# EAGLE board 副机 插座 v0.2 (EAGLE 6.3)
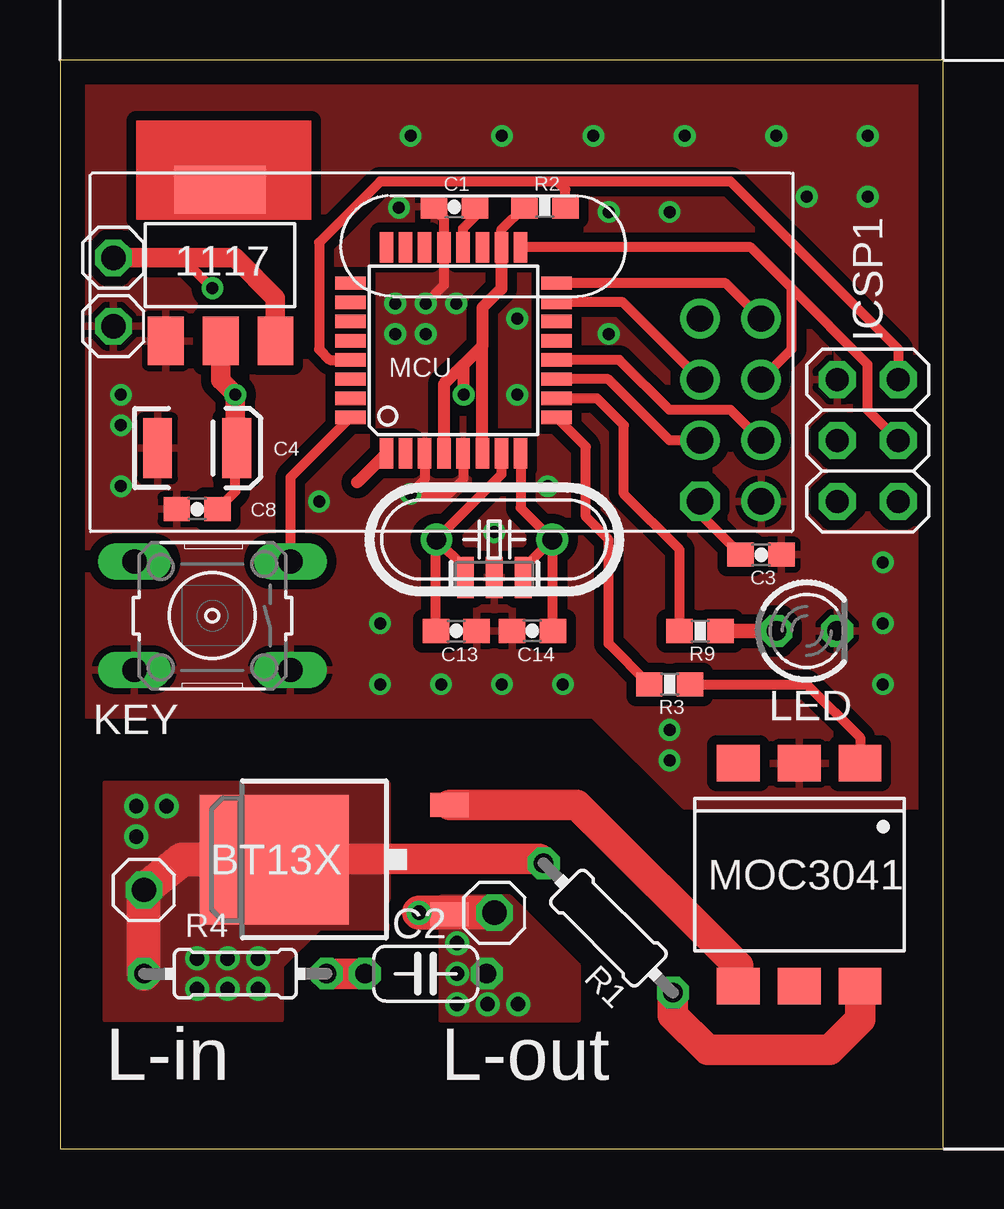
[diagram p0: board, top side]
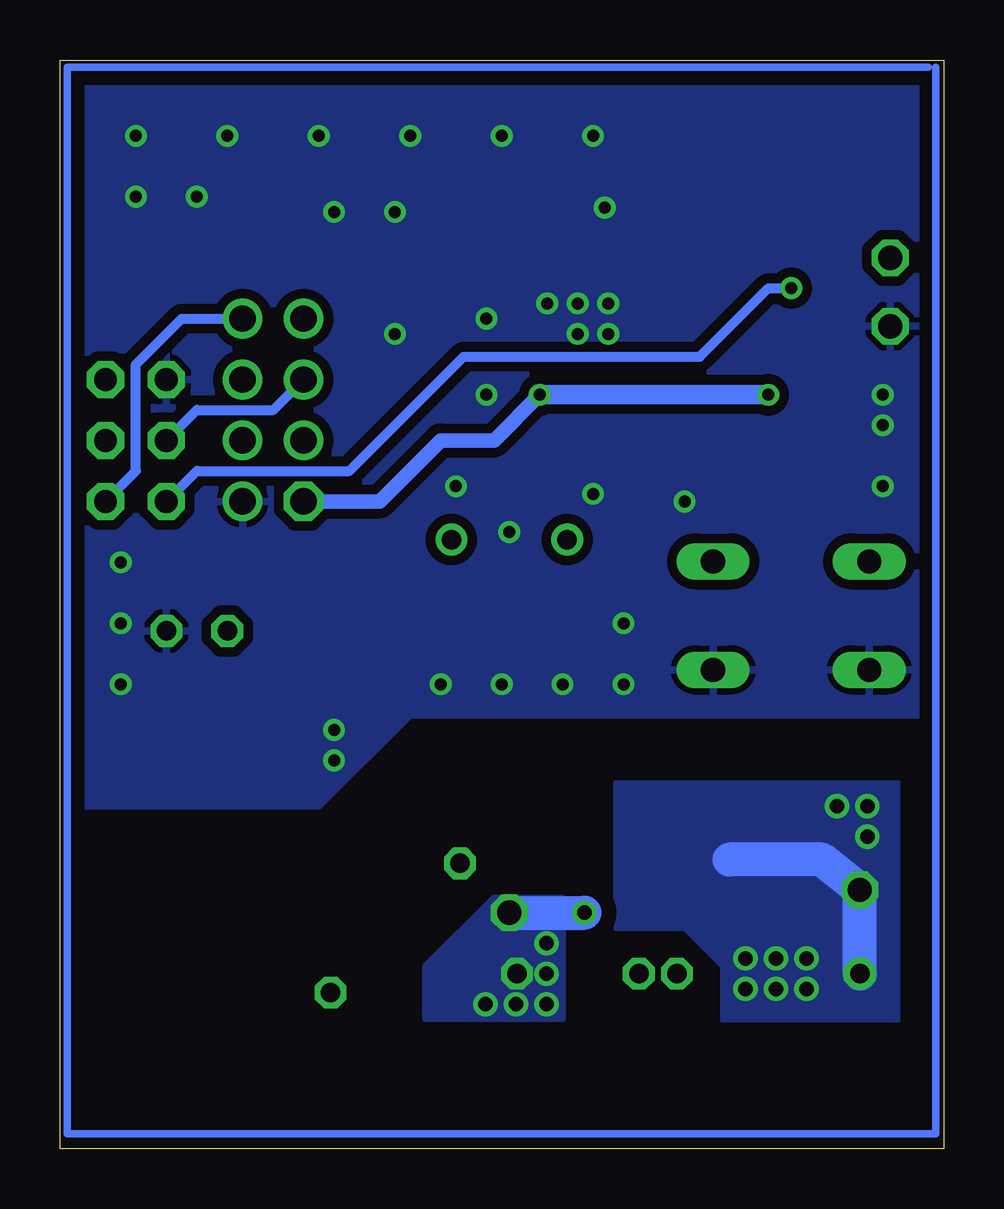
[diagram p1: board, bottom side, seen from below]

Size 36.81 x 45.39 mm. Coordinates in mm from the lower left corner, seen from the top.
Outline: 0,0 36.81,0 36.81,45.39 0,45.39 0,0
Copper layers (1*16): Top 0.035mm / dielectric 1.5mm / Bottom 0.035mm
Design rules "default": minimum track width 10mil, minimum drill 24mil, track to track 8mil, track to pad 8mil, pad to pad 8mil, via to via 8mil, smd to smd 8mil, copper to edge 40mil, drill to drill 8mil, minimum pad ring 10mil, minimum via ring 8mil, stop-mask expansion 4mil, vias tented up to drill 0mil, thermal gap 10mil
Net classes: 0 default: width 0.254 mm, clearance 0.254 mm; 1 power: width 0.381 mm; 2 gnd: width 0.305 mm, drill 0.559 mm, clearance 0.254 mm; 3 usbvcc: width 0.508 mm, drill 0.61 mm, clearance 0.254 mm

## Footprints (pad centres in the part's own frame; a part is rotated, then mirrored left to right if it is on the bottom)
SOT223 = smd 1.499 x 2.007: 1 -2.261,-3.15; 2 0.025,-3.15; 3 2.311,-3.15 | smd 3.81 x 2.007: 4 0,3.15
TO252 = smd 1 x 1.6: 1 -2.28,-4.8; 2 2.28,-4.8 | smd 5.4 x 6.2: 3 0,2.5
0603-CAP = smd 1.1 x 1: 1 -0.85,0; 2 0.85,0
C050-024X044 = drill 0.813 octagon: 1 -2.54,0; 2 2.54,0
EIA3528 = smd 1.2 x 2.5: A 1.65,0; C -1.65,0
2X03 = drill 0.95 pad 1.55 octagon: 1 -2.54,-1.27; 2 -2.54,1.27; 3 0,-1.27; 4 0,1.27; 5 2.54,-1.27; 6 2.54,1.27
B3F-10XX = drill 1.016 long: 1 -3.251,2.261; 2 3.251,2.261; 3 -3.251,-2.261; 4 3.251,-2.261
LED3MM = drill 0.813 octagon: A -1.27,0; K 1.27,0
TQFP32-08 = smd 1.27 x 0.559: 1 -4.293,2.8; 2 -4.293,2; 3 -4.293,1.2; 4 -4.293,0.4; 5 -4.293,-0.4; 6 -4.293,-1.2; 7 -4.293,-2; 8 -4.293,-2.8; 17 4.293,-2.8; 18 4.293,-2; 19 4.293,-1.2; 20 4.293,-0.4; 21 4.293,0.4; 22 4.293,1.2; 23 4.293,2; 24 4.293,2.8 | smd 0.559 x 1.27: 9 -2.8,-4.293; 10 -2,-4.293; 11 -1.2,-4.293; 12 -0.4,-4.293; 13 0.4,-4.293; 14 1.2,-4.293; 15 2,-4.293; 16 2.8,-4.293; 25 2.8,4.293; 26 2,4.293; 27 1.2,4.293; 28 0.4,4.293; 29 -0.4,4.293; 30 -1.2,4.293; 31 -2,4.293; 32 -2.8,4.293
DIL6-SMD = smd 1.78 x 1.52: 1 -2.54,-4.645; 2 0,-4.645; 3 2.54,-4.645; 4 2.54,4.645; 5 0,4.645; 6 -2.54,4.645
HC49/S = drill 0.813: 1 -2.413,0; 2 2.413,0
0204/7 = drill 0.813 octagon: 1 -3.81,0; 2 3.81,0
0603-RES = smd 1.1 x 1: 1 -0.85,0; 2 0.85,0
PIN1 = drill 1.016 octagon: 1 0,0
NRF = drill 1.1: P$1 2.54,-2.54; P$3 2.54,0; P$4 0,0; P$5 2.54,2.54; P$6 0,2.54; P$7 2.54,5.08; P$8 0,5.08 | drill 1.1 octagon: P$2 0,-2.54
RESONATOR-SMD = smd 0.7 x 1.7: 1 -1.2,0; 2 0,0; 3 1.2,0

## Placement (x,y rotation side)
1117  ASM1117  [SOT223]  6.67,36.83 0 top
BT13X  BT136  [TO252]  11.43,12.07 90 top
C1  0.01u  [0603-CAP]  16.43,39.27 180 top
C2  0.01u  [C050-024X044]  15.24,7.3 180 top
C3  0.1uf  [0603-CAP]  29.21,24.77 180 top
C4  0.1uf  [0603-CAP]  5.71,26.67 0 top
C8  220uF  [EIA3528]  5.71,29.21 0 top
C13  22pf  [0603-CAP]  16.51,21.59 180 top
C14  22pf  [0603-CAP]  19.68,21.59 0 top
ICSP1  3x2 M  [2X03]  33.66,29.53 90 top
KEY  key  [B3F-10XX]  6.35,22.22 180 top
LED  red  [LED3MM]  31.11,21.59 0 top
MCU  MEGA8-AI  [TQFP32-08]  16.4,33.29 90 top
MOC3041  MOC3041S  [DIL6-SMD]  30.8,11.43 180 top
Q2  [HC49/S]  18.1,25.4 180 top
R1  2K  [0204/7]  22.85,9.21 135 top
R2  4.7k  [0603-RES]  20.21,39.28 180 top
R3  330  [0603-RES]  25.4,19.37 180 top
R4  100  [0204/7]  7.3,7.3 0 top
R9  1K  [0603-RES]  26.67,21.59 180 top
U$1  [PIN1]  18.1,9.84 0 top
U$2  [PIN1]  3.49,10.79 0 top
U$3  [PIN1]  2.22,37.15 0 top
U$4  [PIN1]  2.22,34.29 0 top
U$6  [NRF]  26.67,29.53 0 top
Y2  RESONATORSMD  [RESONATOR-SMD]  18.1,23.81 0 top

## Library data of the parts
1117 = burr-brown; MPN: REG1117; OC_FARNELL: 1097566; OC_NEWARK: 14P6981
BT13X U$1-U$4 U$6 = PKJ
C1 = MY2
C2 R1 R4 = resistor
C3 C4 C8 R2 R3 R9 Y2 = MY
C13 C14 = 00my
ICSP1 = SmartPrj
KEY = switch-omron; MPN: B3F-1000; OC_FARNELL: 176432; OC_NEWARK: 36M3542
LED = led
MCU = atmel; MPN: ATMEGA8-16AU; OC_FARNELL: 9171371; OC_NEWARK: 73M8863
MOC3041 = optocoupler; MF: FAIRCHILD SEMICONDUCTOR; MPN: MOC3041S-M; OC_FARNELL: unknown; OC_NEWARK: 05C2885
Q2 = crystal; OC_FARNELL: 1667008; OC_NEWARK: unknown

## Nets
A0: MCU.23
A1: MCU.24
A2: MCU.25
A3: MCU.26
A4: MCU.27
A5: MCU.28
A6: MCU.19
A7: MCU.22
AREF: C1.1 MCU.20
D0/RXI: MCU.30
D1/TXO: MCU.31
D2/INT0: KEY.3 MCU.32
D3: MCU.1
D4: MCU.2
D5/PWM: MCU.9 R3.2
D6/PWM: MCU.10 R9.2
D7: MCU.11 U$6.P$4
D8: MCU.12 U$6.P$3
D9/PWM: MCU.13
D10/SS/PWM: MCU.14
D11/MOSI/PWM: ICSP1.4 MCU.15 U$6.P$6
D12/MISO: ICSP1.1 MCU.16 U$6.P$7
D13/SCK: ICSP1.3 MCU.17 U$6.P$5
GND: 1117.1 C1.2 C3.1 C4.1 C8.C C13.1 C14.1 ICSP1.6 KEY.1 KEY.2 LED.K MCU.3 MCU.5 MCU.21 MOC3041.2 U$4.1 U$6.P$1 Y2.2
IN: BT13X.3 R1.2 R4.1 U$2.1
N$1: MOC3041.6 R1.1
N$2: BT13X.2 MOC3041.4
N$6: C2.2 R4.2
N$15: LED.A R9.1
N$34: C13.2 MCU.7 Q2.2 Y2.1
N$35: C14.2 MCU.8 Q2.1 Y2.3
OUT: BT13X.1 C2.1 U$1.1
P1: MOC3041.1 R3.1
RESET: ICSP1.5 MCU.29 R2.1
VCC: 1117.2 C3.2 C4.2 C8.A MCU.4 MCU.6 MCU.18 R2.2 U$6.P$2
VIN: 1117.3 ICSP1.2 U$3.1

## Tracks (layer width: path | path; a pad name or v marks a point on that pad's centre or on a via)
AREF
  Top 0.406: MCU.20 16.8,38.37 17.28,38.86 C1.1
D2/INT0
  Top 0.406: MCU.32 9.6,27.98 KEY.3
D3
  Top 0.508: MCU.1 12.38,27.78
D5/PWM
  Top 0.406: R3.2 22.86,21.06 22.86,25.4 21.91,26.35 21.91,29.27 MCU.9
D6/PWM
  Top 0.406: MCU.10 22.37,31.29 23.49,30.16 23.49,27.31 25.82,24.98 R9.2
D7
  Top 0.406: U$6.P$4 25.4,29.53 22.84,32.09 MCU.11
D8
  Top 0.406: U$6.P$3 27.94,30.8 25.4,30.8 23.31,32.89 MCU.12
D11/MOSI/PWM
  Top 0.406: U$6.P$6 23.45,35.29 MCU.15
  Bottom 0.406: ICSP1.4 31.11,30.8 27.94,30.8 U$6.P$6
D12/MISO
  Top 0.406: U$6.P$7 27.73,36.09 MCU.16
  Bottom 0.406: ICSP1.1 33.66,28.26 33.66,32.7 31.75,34.61 U$6.P$7
D13/SCK
  Top 0.406: U$6.P$5 30.48,33.34 30.48,35.88 | 30.48,35.88 28.78,37.58 MCU.17 | ICSP1.3 33.66,30.8 33.66,32.7 30.48,35.88
GND  (via drill 0.5)
  Top 0.406: MCU.3 15.2,27.9 v14.61,27.31 16.19,27.31 16.8,27.91 MCU.5 | v15.24,35.24 16,36 MCU.21 16,38.8 15.54,39.26 15.57,39.26 C1.2
  other vias: 15.88,19.37 18.41,19.37 20.95,19.37 16.51,35.24 33.66,39.69 31.11,39.69 25.4,39.05 22.86,39.05 19.05,31.43 10.79,26.99 34.29,21.91 34.29,24.45 34.29,19.37 20.32,27.62 18.1,25.72 14.12,39.23 15.24,33.97 13.97,33.97 13.97,35.24 33.66,42.23 29.84,42.23 26.04,42.23 22.22,42.23 18.41,42.23 14.61,42.23 22.22,42.23 22.86,33.97 13.34,19.37 13.34,21.91 2.54,30.16 2.54,27.62 2.54,31.43 25.4,17.46 25.4,16.19 19.05,34.61
  pour Bottom (isolate 0.406): 0.64,44.45 36.2,44.45 36.2,14.29 26.04,14.29 22.22,18.1 0.64,18.1
  pour Top (isolate 0.406): 0.64,44.45 36.2,44.45 36.2,14.29 26.04,14.29 22.22,18.1 0.64,18.1
IN  (via drill 0.6)
  Top 1.27: BT13X.3 8.94,12.08 19.98,12.08 R1.2
  Top 1.422: BT13X.3 5.08,12.07 U$2.1 R4.1
  Bottom 1.422: BT13X.3 5.08,12.07 U$2.1 R4.1
  other vias: 3.17,14.29 4.45,14.29 3.17,13.02 5.71,6.67 6.99,6.67 8.26,6.67 6.99,7.94 5.71,7.94 8.26,7.94
  pour Bottom (isolate 0.61, no thermals): 1.91,15.24 13.65,15.24 13.65,9.21 10.79,9.21 9.21,7.62 9.21,5.4 1.91,5.4
  pour Top (isolate 0.61, no thermals): 1.91,15.24 13.65,15.24 13.65,9.21 10.79,9.21 9.21,7.62 9.21,5.4 1.91,5.4
N$1
  Top 1.27: R1.1 25.54,5.57 26.99,4.13 32.07,4.13 33.34,5.4 MOC3041.6
N$2
  Top 1.27: BT13X.2 21.53,14.34 28.26,7.62 MOC3041.4
N$6
  Top 1.27: C2.2 R4.2
N$14
  Bottom 0.305: 0.64,45.08 36.51,45.08 36.51,0.64 0.32,0.64 0.32,45.08
N$15
  Top 0.61: R9.1 LED.A
N$34
  Top 0.406: MCU.7 18.4,28.11 Q2.2 | Y2.1 16.9,24.19 Q2.2 | C13.2 15.66,25.38 Q2.2
N$35
  Top 0.406: MCU.8 19.2,26.71 Q2.1 | Y2.3 19.3,24.19 Q2.1 | C14.2 20.54,25.38 Q2.1
OUT  (via drill 0.6)
  Top 0.406: v14.96,9.84 BT13X.1
  Top 1.422: U$1.1 v14.96,9.84
  Bottom 1.422: U$1.1 v14.96,9.84
  other vias: 16.55,6.03 16.55,7.3 16.55,8.57 17.82,6.03 19.09,6.03
  pour Top (isolate 0.61, no thermals): 15.88,10.48 15.88,5.4 21.59,5.4 21.59,7.62 18.73,10.48
  pour Bottom (isolate 0.61, no thermals): 15.88,10.48 15.88,5.4 21.59,5.4 21.59,7.62 18.73,10.48
P1
  Top 0.406: R3.1 31.11,19.37 33.34,17.15 MOC3041.1
RESET
  Top 0.406: 20.73,40.32 27.94,40.32 34.93,33.34 ICSP1.5 | 20.73,40.32 13.34,40.32 10.79,37.78 10.79,33.34 11.25,32.89 MCU.29 | R2.1 21.06,39.99 20.73,40.32
VCC  (via drill 0.5)
  Top 0.406: C3.2 26.67,26.45 U$6.P$2 | C8.A 7.3,28.95 | MCU.18 18.4,38.32 R2.2 | C4.2 7.3,27.41 7.3,30.8
  Top 0.508: 17.6,33.47 16.83,32.7 | 16.83,32.7 16,31.87 MCU.4 | MCU.6 17.6,33.47 | v16.83,31.43 16.83,32.7 | MCU.18 18.4,35.86 17.6,35.06 17.6,33.47
  Top 0.813: 1117.2 6.69,32.04 v7.3,31.43 7.3,30.8 7.3,28.95
  Bottom 0.61: U$6.P$2 23.49,26.99 20.95,29.53 18.73,29.53 v16.83,31.43
  Bottom 0.813: v7.3,31.43 v16.83,31.43
VIN  (via drill 0.5)
  Top 0.406: v6.35,35.88 5.08,37.15 4.45,37.15
  Top 0.813: U$3.1 4.45,37.15 7.3,37.15 8.98,35.47 1117.3
  Bottom 0.406: ICSP1.2 31.11,28.26 24.76,28.26 20,33.02 10.16,33.02 7.3,35.88 v6.35,35.88
(copper drawn outside any net)
  shapes: Top area x1

## Text on the board
tPlace: L-in | L-out
tStop: v